# Altium PCB medidor_inductancias.PcbDoc
Units mm, origin at the board's own origin, x right, y up, seen from the top; angles counter-clockwise.
Board outline 84.06 x 49.26 mm, 2 copper layers (Top Layer, Bottom Layer); 18 components, 13 nets, 73 pads, 0 vias.
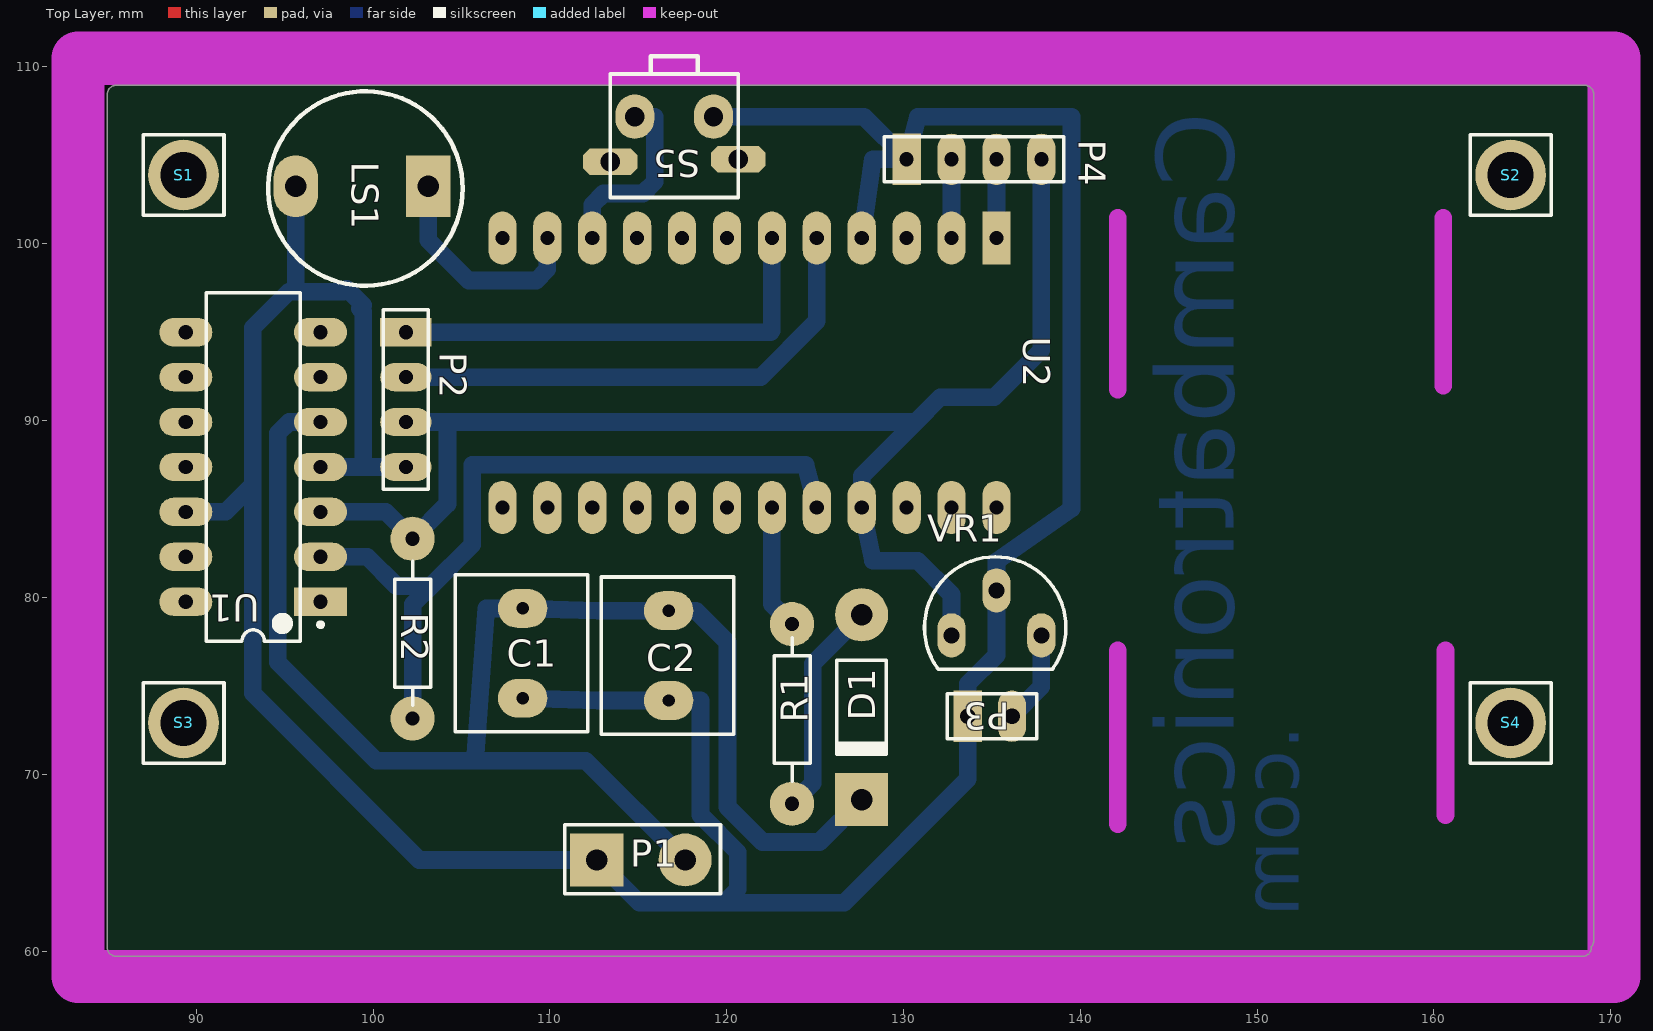
[diagram p0: Top Layer view]
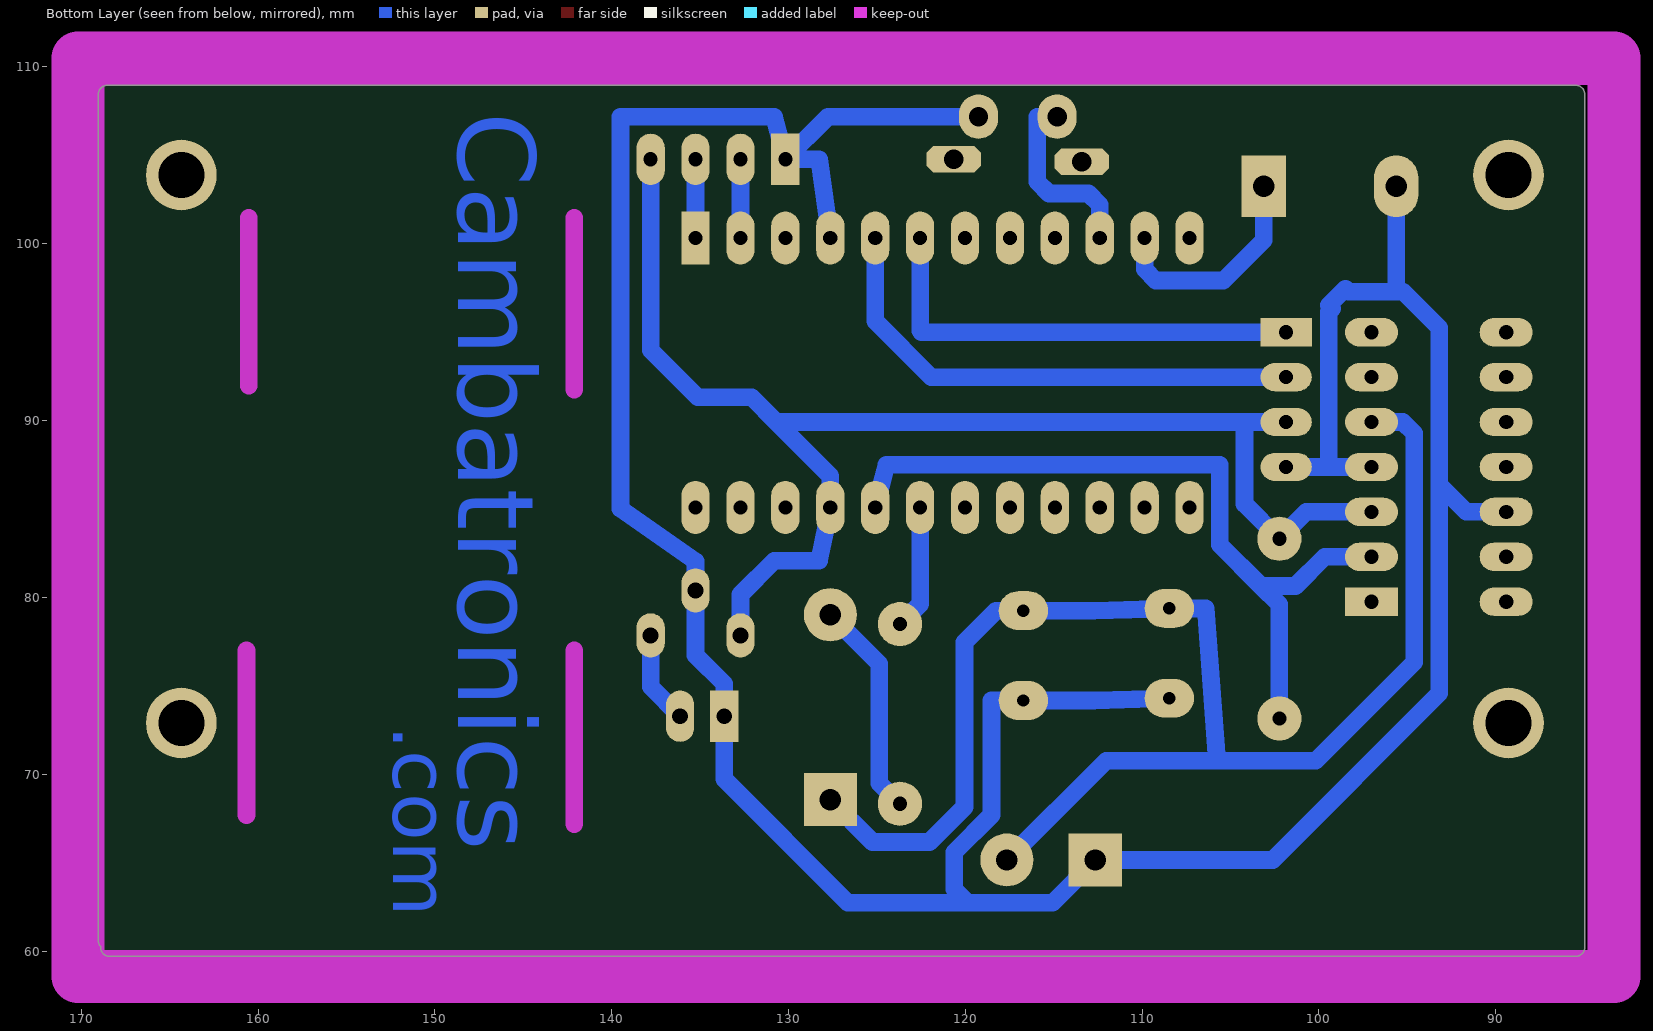
[diagram p1: Bottom Layer view, seen from below]
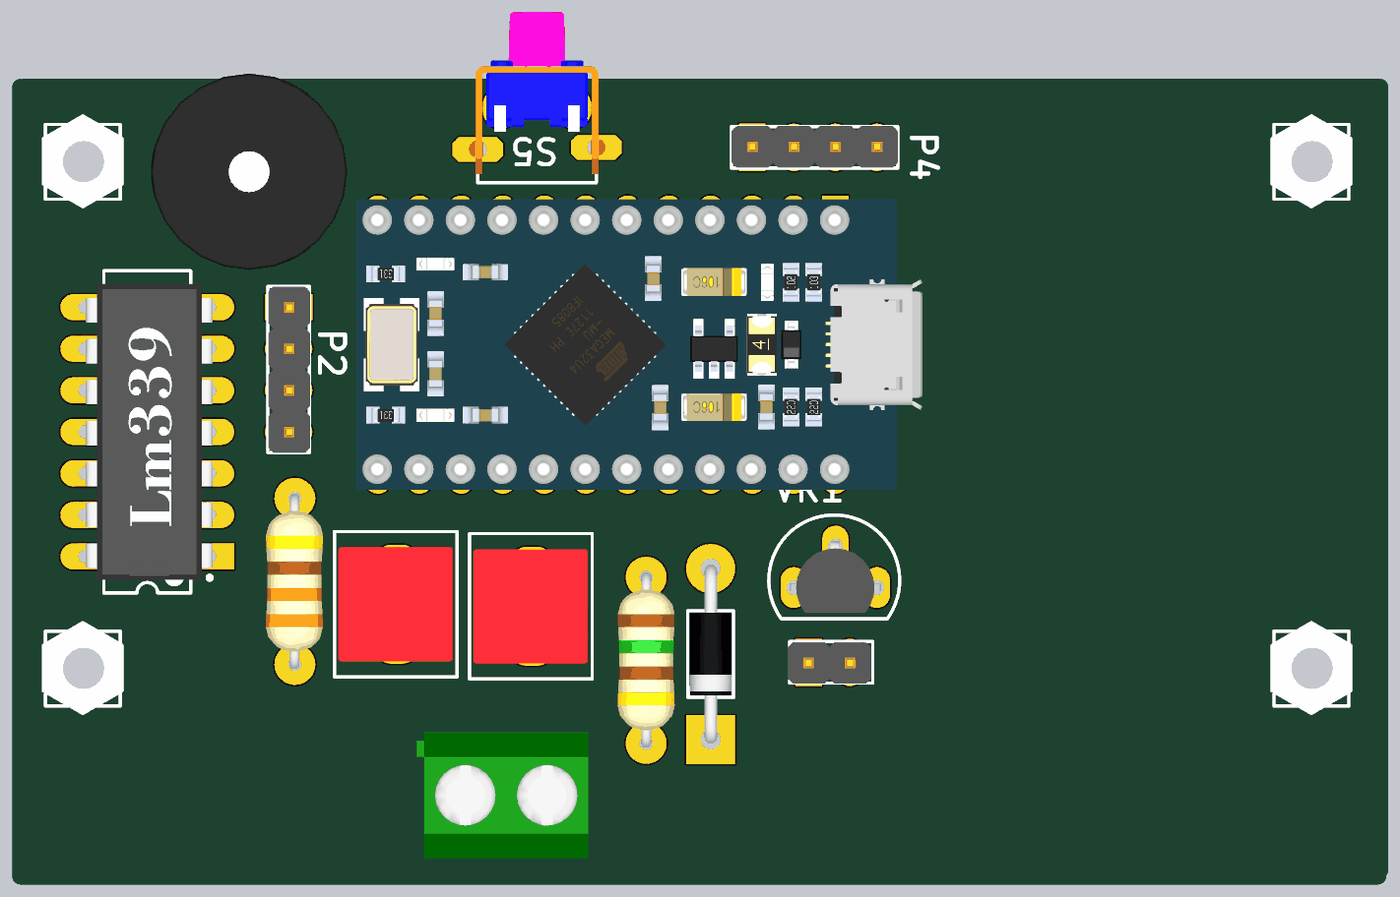
[diagram p2: 3D render of the assembled board from above, using the file's embedded part models]

## Layer stack, top to bottom
Top Solder: solder mask 0.0102, Solder Resist, Dk 3.5
Top Layer: signal copper 0.0356
Dielectric 1: dielectric 0.32, FR-4, Dk 4.8
Bottom Layer: signal copper 0.0356
Bottom Solder: solder mask 0.0102, Solder Resist, Dk 3.5

## Board outline
84.971,60.198 ccw(c85.471,60.198) 85.471,59.698 168.402,59.698 ccw(c168.402,60.198) 168.902,60.198 ccw(c168.402,60.198) 168.9,60.244 ccw(c168.529,60.579) 169.029,60.579 169.029,108.458 ccw(c168.529,108.458) 168.529,108.958 85.598,108.958 ccw(c85.598,108.458) 85.534,108.954 ccw(c85.471,108.458) 84.971,108.458

## Design rules (kind name [scope] priority, off if disabled: settings)
Clearance [All] p1: gap=0.4 ignorepadtopadclearanceinfootprint=FALSE except(0: Arc-Hole Track-Hole SMDPad-Hole THPad-Hole Via-Hole Fill-Hole Poly-Hole Region-Hole Text-Hole)
PolygonConnect [All] p1: connectstyle=Relief reliefconductorwidth=0.254 reliefentries=4 polygonreliefangle="90 Angle" airgapwidth=0.254
RoutingLayers [All] p1: top layer_v5=FALSE bottom layer_v5=TRUE
RoutingVias [All] p1: holewidth=0.711 width=1.27 viastyle="Through Hole" minholewidth=0.711 minwidth=1.27 maxholewidth=0.711 maxwidth=1.27
SolderMaskExpansion [All] p1: expansion=0.102
Width [All] p1: maxlimit=1.5 minlimit=0.8 preferedwidth=1
29 further rules are at their usual default settings.

## Components (designator, comment, footprint, x,y, rotation, side; value= is the part's Value field where it differs from the comment)
C1 "1uf" condensador_1uf_10mm 108.458,76.835 r90 top
C2 "1uf" condensador_1uf_10mm 116.713,76.708 r90 top value=100pF
D1 "1N4001" DO-41 127.635,73.787 r270 top
LS1 "Buzzer" Buzzer 103.124,103.251 r180 top
P1 "Medida" "power 2" 112.649,65.151 r0 top
P2 "Lcd i2c" HDR1X4 101.854,94.996 r270 top
P3 "9 Vdc" HDR1X2 133.731,73.279 r0 top
P4 "Header 4" HDR1X4 130.175,104.775 r0 top
R1 "" 150 123.698,73.66 r270 top value=150
R2 "" 330 102.235,77.978 r90 top value=330
S1 "Separador Hexagonal" Separador_hex 89.281,103.886 r0 top
S2 "Separador Hexagonal" Separador_hex 164.338,103.886 r0 top
S3 "Separador Hexagonal" Separador_hex 89.281,72.898 r0 top
S4 "Separador Hexagonal" Separador_hex 164.338,72.898 r0 top
S5 "Pulsador" pulsador_pie 120.396,102.616 r180 top
U1 "LM339AN" N14A 93.218,87.376 r180 top
U2 "arduinoMicroLeonardo" ArduinoMicroLeonardo 135.255,100.33 r180 top
VR1 "78l05" 78Lxx 135.128,78.232 r270 top

## Footprints (in the part's own frame and the unit in brackets; to place one, negate y for a bottom-side part, rotate by r counter-clockwise, add the part's x,y. Pads: shape width x height; smd on the part's side, far side on the other; paste and mask are expansions set on the pad)
78Lxx [mm] "78LXX"
  oval 2.5x1.6 hole 0.9: 1(0.381,2.667) 2(-2.159,0.127) 3(0.381,-2.413)
  silkscreen extent -4.06,-3.94 2.29,4.06, body extent -2.43,-2.67 1.91,2.91, height 8
150 [mm] "Resistor; 2 Leads"
  round 2.5 hole 0.8: 1(-4.826,0) 2(5.334,0)
  silkscreen extent -4.06,-1.02 4.06,1.02, body extent -5.13,-1.75 5.59,1.75, height 3.54
330 [mm] "Resistor; 2 Leads"
  round 2.5 hole 0.8: 1(-4.826,0) 2(5.334,0)
  silkscreen extent -4.06,-1.02 4.06,1.02, body extent -5.11,-1.73 5.61,1.78, height 3.54
ArduinoMicroLeonardo [mm] "arduino nano"
  rect 1.6x3 hole 0.8: 0(0,0)
  oval 1.6x3 hole 0.8: 1(2.54,0) 2(5.08,0) 3(7.62,0) 4(10.16,0) 5(12.7,0) 6(15.24,0) 7(17.78,0) 8(20.32,0) 9(22.86,0) 10(25.4,0) 11(27.94,0) 12(27.94,15.24) 13(25.4,15.24) 14(22.86,15.24) 15(20.32,15.24) 16(17.78,15.24) 17(15.24,15.24) 18(12.7,15.24) 19(10.16,15.24) 20(7.62,15.24) 21(5.08,15.24) 22(2.54,15.24) 23(0,15.24)
  body extent -5.33,-1.27 29.26,16.51, height 9.25
Buzzer [mm] "Connector; Header; 2 Position"
  rect 2.5x3.5 hole 1.2: 1(0,0)
  oval 2.5x3.5 hole 1.2: 2(7.493,0)
  silkscreen extent -1.94,-5.37 9.05,5.63, body extent -2.32,-6.03 9.68,5.97, height 9
condensador_1uf_10mm [mm] "Jumper Wire; 2 Leads"
  oval 2.2x2.8 hole 0.7: 1(-2.54,0) 2(2.54,0)
  silkscreen extent -4.44,-3.68 4.44,3.81, body extent -3.5,-3.43 3.5,3.57, height 13.07
DO-41 [mm] "Diode, Axial; Body 5.2 x 2.7 mm (LxDia. max), Lead Dia. 0.86 mm (max)"
  round 3 hole 1.2: 1(-5.23,0)
  rect 3x3 hole 1.2: 2(5.23,0)
  silkscreen extent -2.65,-1.4 2.75,1.4, body extent -5.46,-1.27 5.46,1.3, height 3.55
HDR1X2 [mm] "Connector; Header; 2 Position"
  rect 1.6x2.9 hole 0.9: 1(-0.1,0)
  oval 1.6x2.9 hole 0.9: 2(2.4,0)
  silkscreen extent -1.27,-1.27 3.81,1.27, body extent -1.38,-1.3 3.7,1.24, height 10.1
HDR1X4 [mm] "Connector; Header; 4 Position"
  rect 1.6x2.9 hole 0.8: 1(0,0)
  oval 1.6x2.9 hole 0.8: 2(2.54,0) 3(5.08,0) 4(7.62,0)
  silkscreen extent -1.27,-1.27 8.89,1.27, body extent -1.26,-1.24 8.9,1.3, height 10.1
N14A [mm] "DIP, 14-Leads, Row Spacing 7.62mm, Pitch 2.54mm, Body 19.56x6.35mm"
  rect 3x1.6 hole 0.8: 1(-3.81,7.62)
  oval 3x1.6 hole 0.8: 2(-3.81,5.08) 3(-3.81,2.54) 4(-3.81,0) 5(-3.81,-2.54) 6(-3.81,-5.08) 7(-3.81,-7.62) 8(3.81,-7.62) 9(3.81,-5.08) 10(3.81,-2.54) 11(3.81,0) 12(3.81,2.54) 13(3.81,5.08) 14(3.81,7.62)
  silkscreen extent -3.94,-9.85 2.65,9.85, body extent -4.01,-9.05 3.75,9.05, height 4.6
"power 2" [mm] "Connector; Header; 2 Position"
  rect 3x3 hole 1.2: 1(0,0)
  round 3 hole 1.2: 2(5,0)
  silkscreen extent -1.8,-1.9 7,2, body extent -3,-3.85 7.5,3.85, height 10
pulsador_pie [mm] "Pulsador 14x12"
  oct 3.1x1.5 hole 1.1: 0(-0.254,-2.159) 0(6.985,-2.032)
  oval 2.2x2.5 hole 1.1: 1(1.143,-4.572) 2(5.588,-4.572)
  silkscreen extent -0.25,-8 6.99,0, body extent -0.88,-10.41 7.62,-0.51, height 7.4
Separador_hex [mm] "Connector; Header; 2 Position"
  round 4 hole 2.6: 1(0,0)
  silkscreen extent -2.29,-2.29 2.29,2.29, body extent -2.5,-2.85 2.5,2.92, height 20

## Part data
C1 C2: library part Cap, "Capacitor", LatestRevisionDate=17-Jul-2002, LatestRevisionNote="Re-released for DXP Platform.", PackageReference=RAD-0.3, Published=8-Jun-2000, Publisher="Altium Limited"
D1: library part "Diode 1N4001", "1 Amp General Purpose Rectifier", PackageDocument=Aug-1999, Code_JEDEC=DO-204-AL, ComponentLink1Description="Manufacturer Link", ComponentLink1URL=http://www.fairchildsemi.com/, ComponentLink2Description=Datasheet, ComponentLink2URL=http://www.fairchildsemi.com/ds/1N%2F1N4001.pdf, DatasheetDocument=1998, LatestRevisionDate=17-Jul-2002, LatestRevisionNote="Re-released for DXP Platform.", PackageReference=DO-41, Published=8-Jun-2000, Publisher="Altium Limited"
LS1: "Magnetic Transducer Buzzer", ComponentLink1Description="Manufacturer Link", ComponentLink1URL=http://www.megastar.com/linecard/buzzmode/index.php, DatasheetDocument=17-Dec-2003, LatestRevisionDate=17-Dec-2003, LatestRevisionNote="Schematic revised, PCB Footprint replaced.", PackageReference=ABSM-1574, Published=24-Mar-1999, Publisher="Altium Limited"
P1: library part "Borna 2", "Header, 2-Pin", LatestRevisionDate=17-Jul-2002, LatestRevisionNote="Re-released for DXP Platform.", Publisher="Altium Limited"
P2: library part "Header 4", "Lcd", LatestRevisionDate=17-Jul-2002, LatestRevisionNote="Re-released for DXP Platform.", Publisher="Altium Limited"
P3: library part "Header 2", LatestRevisionDate=17-Jul-2002, LatestRevisionNote="Re-released for DXP Platform.", Publisher="Altium Limited"
P4: "Header, 4-Pin", LatestRevisionDate=17-Jul-2002, LatestRevisionNote="Re-released for DXP Platform.", Publisher="Altium Limited"
R1: library part 150, "Resistor", LatestRevisionDate=17-Jul-2002, LatestRevisionNote="Re-released for DXP Platform.", PackageReference=AXIAL-0.3, Published=8-Jun-2000, Publisher="Altium Limited"
R2: library part 330, "Resistor", LatestRevisionDate=17-Jul-2002, LatestRevisionNote="Re-released for DXP Platform.", PackageReference=AXIAL-0.3, Published=8-Jun-2000, Publisher="Altium Limited"
S5: "Pulsador circuito impreso 14x12", LatestRevisionDate=17-Jul-2002, LatestRevisionNote="Re-released for DXP Platform.", PackageReference=SPST-2, Published=24-Mar-1999, Publisher="Altium Limited"
U1: "Low Power Low Offset Voltage Quad Comparator, 14-pin MDIP", Manufacturer="National Semiconductor", PackageTopMarking=NSUZXYYTTE#*LM339AN, PowerWise=N, Supplier Part Number 1=9487646, Code_JEDEC=MS-001-AA, ComponentLink1Description="LM339 Datasheet", ComponentLink1URL=http://www.national.com/ds/LM/LM339.pdf, ComponentLink2Description="LM339 Web Page", ComponentLink2URL=http://www.national.com/pf/LM/LM339.html, ComponentLink3Description="N14A Package Page", ComponentLink3URL=http://www.national.com/packaging/folders/n14a.html, CompType=Amplifiers, DatasheetVersion=Mar-2004, PackageDescription="MDIP, .750 x .250 x.130in, 14 Lead, .100in Pitch", PackageReference=N14A, PackageVersion="revG, May-2006", PartNumber=LM339AN, PinCount=14, Published=4-Dec-2008, Publisher="Altium Limited", RoHS=N, Supplier 1=Farnell
VR1: library part "Volt Reg", "Voltage Regulator", Code_JEDEC=SMD-220, LatestRevisionDate=17-Jul-2002, LatestRevisionNote="Re-released for DXP Platform.", PackageReference=D2PAK, Published=24-Mar-1999, Publisher="Altium Limited"

## Nets (pads, with @x,y where several pads share a name; then routed paths per layer and width w, separated by ;. In a path a pad name is that pad's centre, name@x,y a point inside that pad or via, vN(x,y) a via of type N, cw(c..) or ccw(c..) an arc to the next point about the centre after c; other vN are vias at no path point)
+5: P2.3 P4.4 R2.2 U1.3 U2.20 VR1.3 | length 78.4
  Bottom Layer w1: U1.3 100.711,84.836 R2.2 104.204,85.281 104.204,89.916 ; P2.3 104.204,89.916 ; VR1.3 132.715,80.162 130.81,82.067 128.27,82.067 U2.20 127.635,86.868 130.683,89.916 ; P4.4 137.795,93.98 135.128,91.313 132.08,91.313 130.683,89.916 ; 104.204,89.916 130.683,89.916
GND: C1.1 C2.1 LS1.2 P1.1 P2.4 P3.1 P4.1 S5.1 U1.4 U1.12 U2.3 VR1.2 | length 193.5
  Bottom Layer w1: U1.12 91.669,84.836 93.193,86.36 ; LS1.2 95.631,97.282 ; U1.4 99.441,87.376 ; P2.4 99.441,87.376 ; C1.1 112.725,74.168 C2.1 118.516,74.168 118.516,67.691 120.625,65.583 120.625,63.5 119.863,62.738 ; S5.1 127.762,107.188 P4.1 ; U2.3 128.27,104.775 P4.1 ; 93.193,86.36 93.193,74.574 102.616,65.151 P1.1 115.062,62.738 119.863,62.738 ; 93.193,86.36 93.193,95.25 95.225,97.282 95.631,97.282 ; 95.631,97.282 98.323,97.282 98.501,97.46 99.441,96.52 99.263,96.342 99.441,96.164 99.441,87.376 ; 119.863,62.738 126.644,62.738 133.631,69.725 P3.1 133.631,75.108 135.255,76.732 VR1.2 135.255,82.042 139.497,85.014 139.497,107.188 130.81,107.188 P4.1
NetC1_2: C1.2 C2.2 D1.2 P1.2 U1.5 | length 85
  Bottom Layer w1: U1.5 95.25,89.916 94.615,89.281 94.615,76.327 100.178,70.764 105.766,70.764 ; P1.2 112.036,70.764 105.766,70.764 ; D1.2 125.245,66.167 122.02,66.167 120.04,68.147 120.04,77.47 118.262,79.248 C2.2 112.725,79.248 C1.2 106.401,79.375 105.766,70.764
NetD1_1: D1.1 R1.2 | length 12.3
  Bottom Layer w1: R1.2 124.866,69.494 124.866,76.248 D1.1
NetLS1_1: LS1.1 U2.10 | length 12.8
  Bottom Layer w1: LS1.1 103.124,100.203 105.41,97.917 109.22,97.917 109.855,98.552 U2.10
NetP2_1: P2.1 U2.5 | length 26
  Bottom Layer w1: P2.1 122.479,94.996 122.555,95.072 U2.5
NetP2_2: P2.2 U2.4 | length 29.3
  Bottom Layer w1: P2.2 121.92,92.456 125.095,95.631 U2.4
NetP3_2: P3.2 VR1.1 | length 5.3
  Bottom Layer w1: P3.2 137.795,74.943 VR1.1
NetP4_2: P4.2 U2.1 | length 4.4
  Bottom Layer w1: U2.1 P4.2
NetP4_3: P4.3 U2.0 | length 4.4
  Bottom Layer w1: U2.0 P4.3
NetR1_1: R1.1 U2.18 | length 7.1
  Bottom Layer w1: U2.18 122.555,79.629 R1.1
NetR2_1: R2.1 U1.2 U2.19 | length 44
  Bottom Layer w1: U1.2 99.67,82.296 101.321,80.645 103.276,80.645 ; R2.1 102.235,79.604 103.276,80.645 ; U2.19 124.46,87.503 105.613,87.503 105.613,82.982 103.276,80.645
NetS5_2: S5.2 U2.9 | length 10.7
  Bottom Layer w1: U2.9 112.395,102.21 113.03,102.845 115.265,102.845 115.926,103.505 115.926,107.188 S5.2
pads on no net: S1.1 S2.1 S3.1 S4.1 S5.0 U1.1 U1.6 U1.7 U1.8 U1.9 U1.10 U1.11 U1.13 U1.14 U2.2 U2.6 U2.7 U2.8 U2.11 U2.12 U2.13 U2.14 U2.15 U2.16 U2.17 U2.21 U2.22 U2.23

## Keep-outs
Keep-Out Layer:
  lines w1: 142.113,67.183 142.113,77 ; 142.113,91.758 142.113,101.473 ; 160.528,91.977 160.528,101.473 ; 160.655,67.691 160.655,77
  lines w3: 83.312,58.547 170.18,58.547 170.18,110.49 83.312,110.49 83.312,58.547

## Other copper
Bottom Layer:
  text "Cambatronics" at 150.114,107.442 h7.52 r90
  text ".com" at 153.416,72.771 h5.52 r90